# EAGLE board FFChkMate.job (EAGLE 6.6.0)
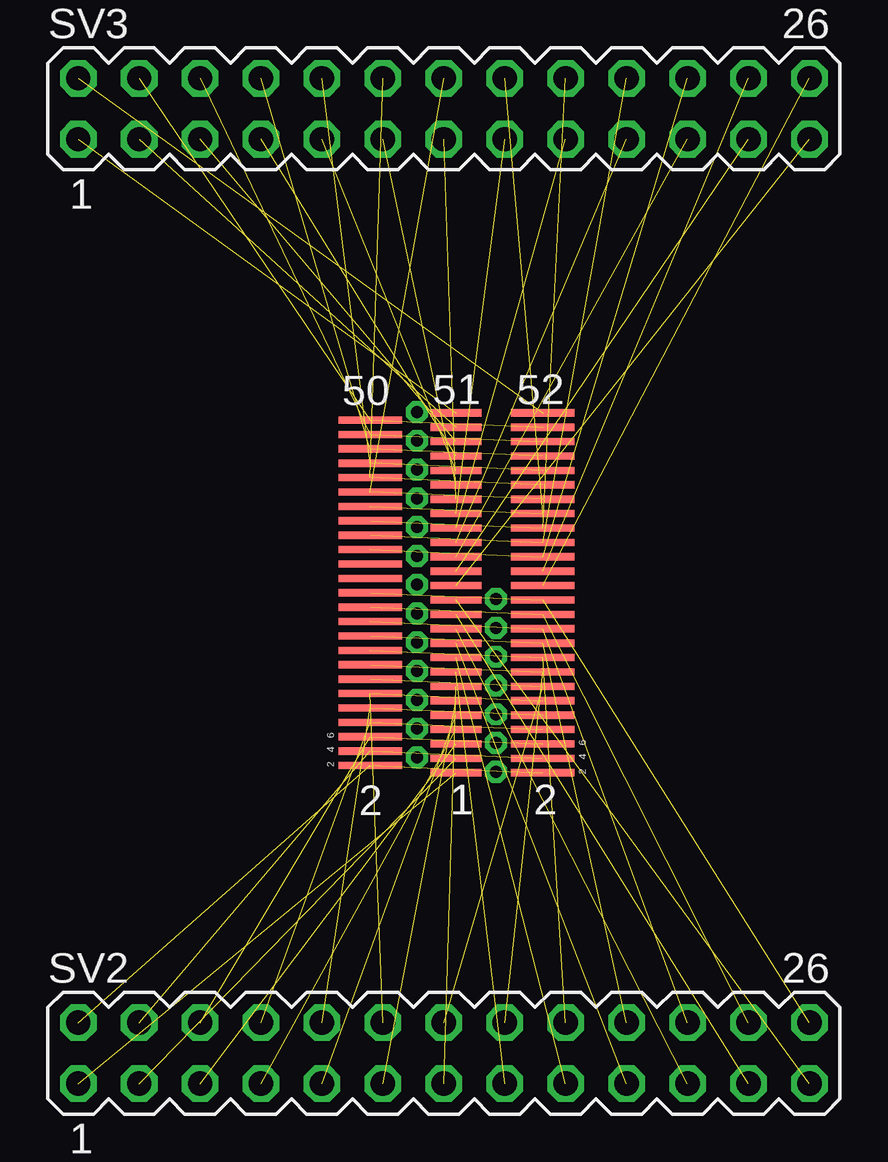
[diagram p0: board, top side]

No outline drawn. Coordinates in mm, seen from the top.
Copper layers (1*16): Top 0.035mm / dielectric 1.5mm / Bottom 0.035mm
Design rules "default *": minimum track width 0.15mm, minimum drill 0.3mm, track to track 0.15mm, track to pad 0.15mm, pad to pad 0.15mm, via to via 0.15mm, smd to smd 0.15mm, copper to edge 40mil, drill to drill 0.25mm, minimum pad ring 10mil, minimum via ring 8mil, stop-mask expansion 4mil, vias tented up to drill 0mil, thermal gap 10mil

## Footprints (pad centres in the part's own frame; a part is rotated, then mirrored left to right if it is on the bottom)
03MM = smd 0.3 x 2.124: 1 -9.9,-1.775; 3 -9.3,-1.775; 5 -8.7,-1.775; 7 -8.1,-1.775; 9 -7.5,-1.775; 11 -6.9,-1.775; 13 -6.3,-1.775; 15 -5.7,-1.775; 17 -5.1,-1.775; 19 -4.5,-1.775; 21 -3.9,-1.775; 23 -3.3,-1.775; 25 -2.7,-1.775; 27 -2.1,-1.775; 29 -1.5,-1.775; 31 -0.9,-1.775; 33 -0.3,-1.775; 35 0.3,-1.775; 37 0.9,-1.775; 39 1.5,-1.775; 41 2.1,-1.775; 43 2.7,-1.775; 45 3.3,-1.775; 47 3.9,-1.775; 49 4.5,-1.775; 51 5.1,-1.775 | smd 0.3 x 2.65: 2 -9.6,1.8; 4 -9,1.8; 6 -8.4,1.8; 8 -7.8,1.8; 10 -7.2,1.8; 12 -6.6,1.8; 14 -6,1.8; 16 -5.4,1.8; 18 -4.8,1.8; 20 -4.2,1.8; 22 -3.6,1.8; 24 -3,1.8; 26 -2.4,1.8; 28 -1.8,1.8; 30 -1.2,1.8; 32 -0.6,1.8; 34 0,1.8; 36 0.6,1.8; 38 1.2,1.8; 40 1.8,1.8; 42 2.4,1.8; 44 3,1.8; 46 3.6,1.8; 48 4.2,1.8; 50 4.8,1.8; 68 -9.9,-5.4; 69 -9.3,-5.4; 70 -8.7,-5.4; 71 -8.1,-5.4; 72 -7.5,-5.4; 73 -6.9,-5.4; 74 -6.3,-5.4; 75 -5.7,-5.4; 76 -5.1,-5.4; 77 -4.5,-5.4; 78 -3.9,-5.4; 79 -3.3,-5.4; 80 -2.7,-5.4; 81 -2.1,-5.4; 82 -1.5,-5.4; 83 -0.9,-5.4; 84 -0.3,-5.4; 85 0.3,-5.4; 86 0.9,-5.4; 87 1.5,-5.4; 88 2.1,-5.4; 89 2.7,-5.4; 90 3.3,-5.4; 91 3.9,-5.4; 92 4.5,-5.4; 93 5.1,-5.4
MA13-2 = drill 1.016 octagon: 1 -15.24,-1.27; 2 -15.24,1.27; 3 -12.7,-1.27; 4 -12.7,1.27; 5 -10.16,-1.27; 6 -10.16,1.27; 7 -7.62,-1.27; 8 -7.62,1.27; 9 -5.08,-1.27; 10 -5.08,1.27; 11 -2.54,-1.27; 12 -2.54,1.27; 13 0,-1.27; 14 0,1.27; 15 2.54,-1.27; 16 2.54,1.27; 17 5.08,-1.27; 18 5.08,1.27; 19 7.62,-1.27; 20 7.62,1.27; 21 10.16,-1.27; 22 10.16,1.27; 23 12.7,-1.27; 24 12.7,1.27; 25 15.24,-1.27; 26 15.24,1.27

## Placement (x,y rotation side)
SV1  [03MM]  38.1,29.21 90 top
SV2  [MA13-2]  39.37,7.62 0 top
SV3  [MA13-2]  39.37,46.99 0 top

## Library data of the parts
SV1 = FFChkMate
SV2 SV3 = con-lstb; OC_FARNELL: unknown; OC_NEWARK: unknown

## Nets
N$1: SV1.1 SV2.1
N$2: SV1.3 SV2.3
N$3: SV1.5 SV2.5
N$4: SV1.7 SV2.7
N$5: SV1.9 SV2.9
N$6: SV1.11 SV2.11
N$7: SV1.13 SV2.13
N$8: SV1.15 SV2.15
N$9: SV1.17 SV2.17
N$10: SV1.19 SV2.19
N$11: SV1.21 SV2.21
N$12: SV1.23 SV2.23
N$13: SV1.25 SV2.25
N$14: SV1.2 SV1.68 SV2.2
N$15: SV1.4 SV1.69 SV2.4
N$16: SV1.6 SV1.70 SV2.6
N$17: SV1.8 SV1.71 SV2.8
N$18: SV1.10 SV1.72 SV2.10
N$19: SV1.12 SV1.73 SV2.12
N$20: SV1.14 SV1.74 SV2.14
N$21: SV1.16 SV1.75 SV2.16
N$22: SV1.18 SV1.76 SV2.18
N$23: SV1.20 SV1.77 SV2.20
N$24: SV1.22 SV1.78 SV2.22
N$25: SV1.24 SV1.79 SV2.24
N$26: SV1.26 SV1.80 SV2.26
N$27: SV1.51 SV3.1
N$28: SV1.49 SV3.3
N$29: SV1.47 SV3.5
N$30: SV1.45 SV3.7
N$31: SV1.43 SV3.9
N$32: SV1.41 SV3.11
N$33: SV1.39 SV3.13
N$34: SV1.37 SV3.15
N$35: SV1.35 SV3.17
N$36: SV1.33 SV3.19
N$37: SV1.31 SV3.21
N$38: SV1.29 SV3.23
N$39: SV1.27 SV3.25
N$40: SV1.93 SV3.2
N$41: SV1.50 SV1.92 SV3.4
N$42: SV1.48 SV1.91 SV3.6
N$43: SV1.46 SV1.90 SV3.8
N$44: SV1.44 SV1.89 SV3.10
N$45: SV1.42 SV1.88 SV3.12
N$46: SV1.40 SV1.87 SV3.14
N$47: SV1.38 SV1.86 SV3.16
N$48: SV1.36 SV1.85 SV3.18
N$49: SV1.34 SV1.84 SV3.20
N$50: SV1.32 SV1.83 SV3.22
N$51: SV1.82 SV3.24
N$52: SV1.81 SV3.26

## Tracks (layer width: path | path; a pad name or v marks a point on that pad's centre or on a via)
N$1  (1 unrouted)
N$2  (1 unrouted)
N$3  (1 unrouted)
N$4  (1 unrouted)
N$5  (1 unrouted)
N$6  (1 unrouted)
N$7  (1 unrouted)
N$8  (1 unrouted)
N$9  (1 unrouted)
N$10  (1 unrouted)
N$11  (1 unrouted)
N$12  (1 unrouted)
N$13  (1 unrouted)
N$14  (2 unrouted)
N$15  (2 unrouted)
N$16  (2 unrouted)
N$17  (2 unrouted)
N$18  (2 unrouted)
N$19  (2 unrouted)
N$20  (2 unrouted)
N$21  (2 unrouted)
N$22  (2 unrouted)
N$23  (2 unrouted)
N$24  (2 unrouted)
N$25  (2 unrouted)
N$26  (2 unrouted)
N$27  (1 unrouted)
N$28  (1 unrouted)
N$29  (1 unrouted)
N$30  (1 unrouted)
N$31  (1 unrouted)
N$32  (1 unrouted)
N$33  (1 unrouted)
N$34  (1 unrouted)
N$35  (1 unrouted)
N$36  (1 unrouted)
N$37  (1 unrouted)
N$38  (1 unrouted)
N$39  (1 unrouted)
N$40  (1 unrouted)
N$41  (2 unrouted)
N$42  (2 unrouted)
N$43  (2 unrouted)
N$44  (2 unrouted)
N$45  (2 unrouted)
N$46  (2 unrouted)
N$47  (2 unrouted)
N$48  (2 unrouted)
N$49  (2 unrouted)
N$50  (2 unrouted)
N$51  (1 unrouted)
N$52  (1 unrouted)
S$1  (via drill 0.5 pad 0.25)
  other vias: 41.55,26.55
S$2  (via drill 0.5 pad 0.25)
  other vias: 41.55,25.35
S$3  (via drill 0.5 pad 0.25)
  other vias: 41.55,24.15
S$4  (via drill 0.5 pad 0.25)
  other vias: 41.55,22.95
S$5  (via drill 0.5 pad 0.25)
  other vias: 41.55,21.75
S$6  (via drill 0.5 pad 0.25)
  other vias: 41.55,20.55
S$7  (via drill 0.5 pad 0.25)
  other vias: 41.55,19.35
S$8  (via drill 0.5 pad 0.25)
  other vias: 38.25,25.95
S$9  (via drill 0.5 pad 0.25)
  other vias: 38.25,24.75
S$10  (via drill 0.5 pad 0.25)
  other vias: 38.25,23.55
S$11  (via drill 0.5 pad 0.25)
  other vias: 38.25,22.35
S$12  (via drill 0.5 pad 0.25)
  other vias: 38.25,21.15
S$13  (via drill 0.5 pad 0.25)
  other vias: 38.25,19.95
S$14  (via drill 0.5 pad 0.25)
  other vias: 38.25,27.15
S$15  (via drill 0.5 pad 0.25)
  other vias: 38.25,28.35
S$16  (via drill 0.5 pad 0.25)
  other vias: 38.25,29.55
S$17  (via drill 0.5 pad 0.25)
  other vias: 38.25,30.75
S$18  (via drill 0.5 pad 0.25)
  other vias: 38.25,31.95
S$19  (via drill 0.5 pad 0.25)
  other vias: 38.25,33.15
S$20  (via drill 0.5 pad 0.25)
  other vias: 38.25,34.35

## Text on the board
tNames: 50 | 51 | 52 | 6 | 6 | 2 | 4 | 2 | 4 | 2 | 1 | 2